# Altium PCB ATRACK_HOST_V1.PcbDoc (part 2 of 3)
Units mm, origin at the board's own origin, x right, y up, seen from the top; angles counter-clockwise.
Board outline 156.4 x 87 mm, 2 copper layers (Top Layer, Bottom Layer); 274 components, 223 nets, 864 pads, 145 vias.
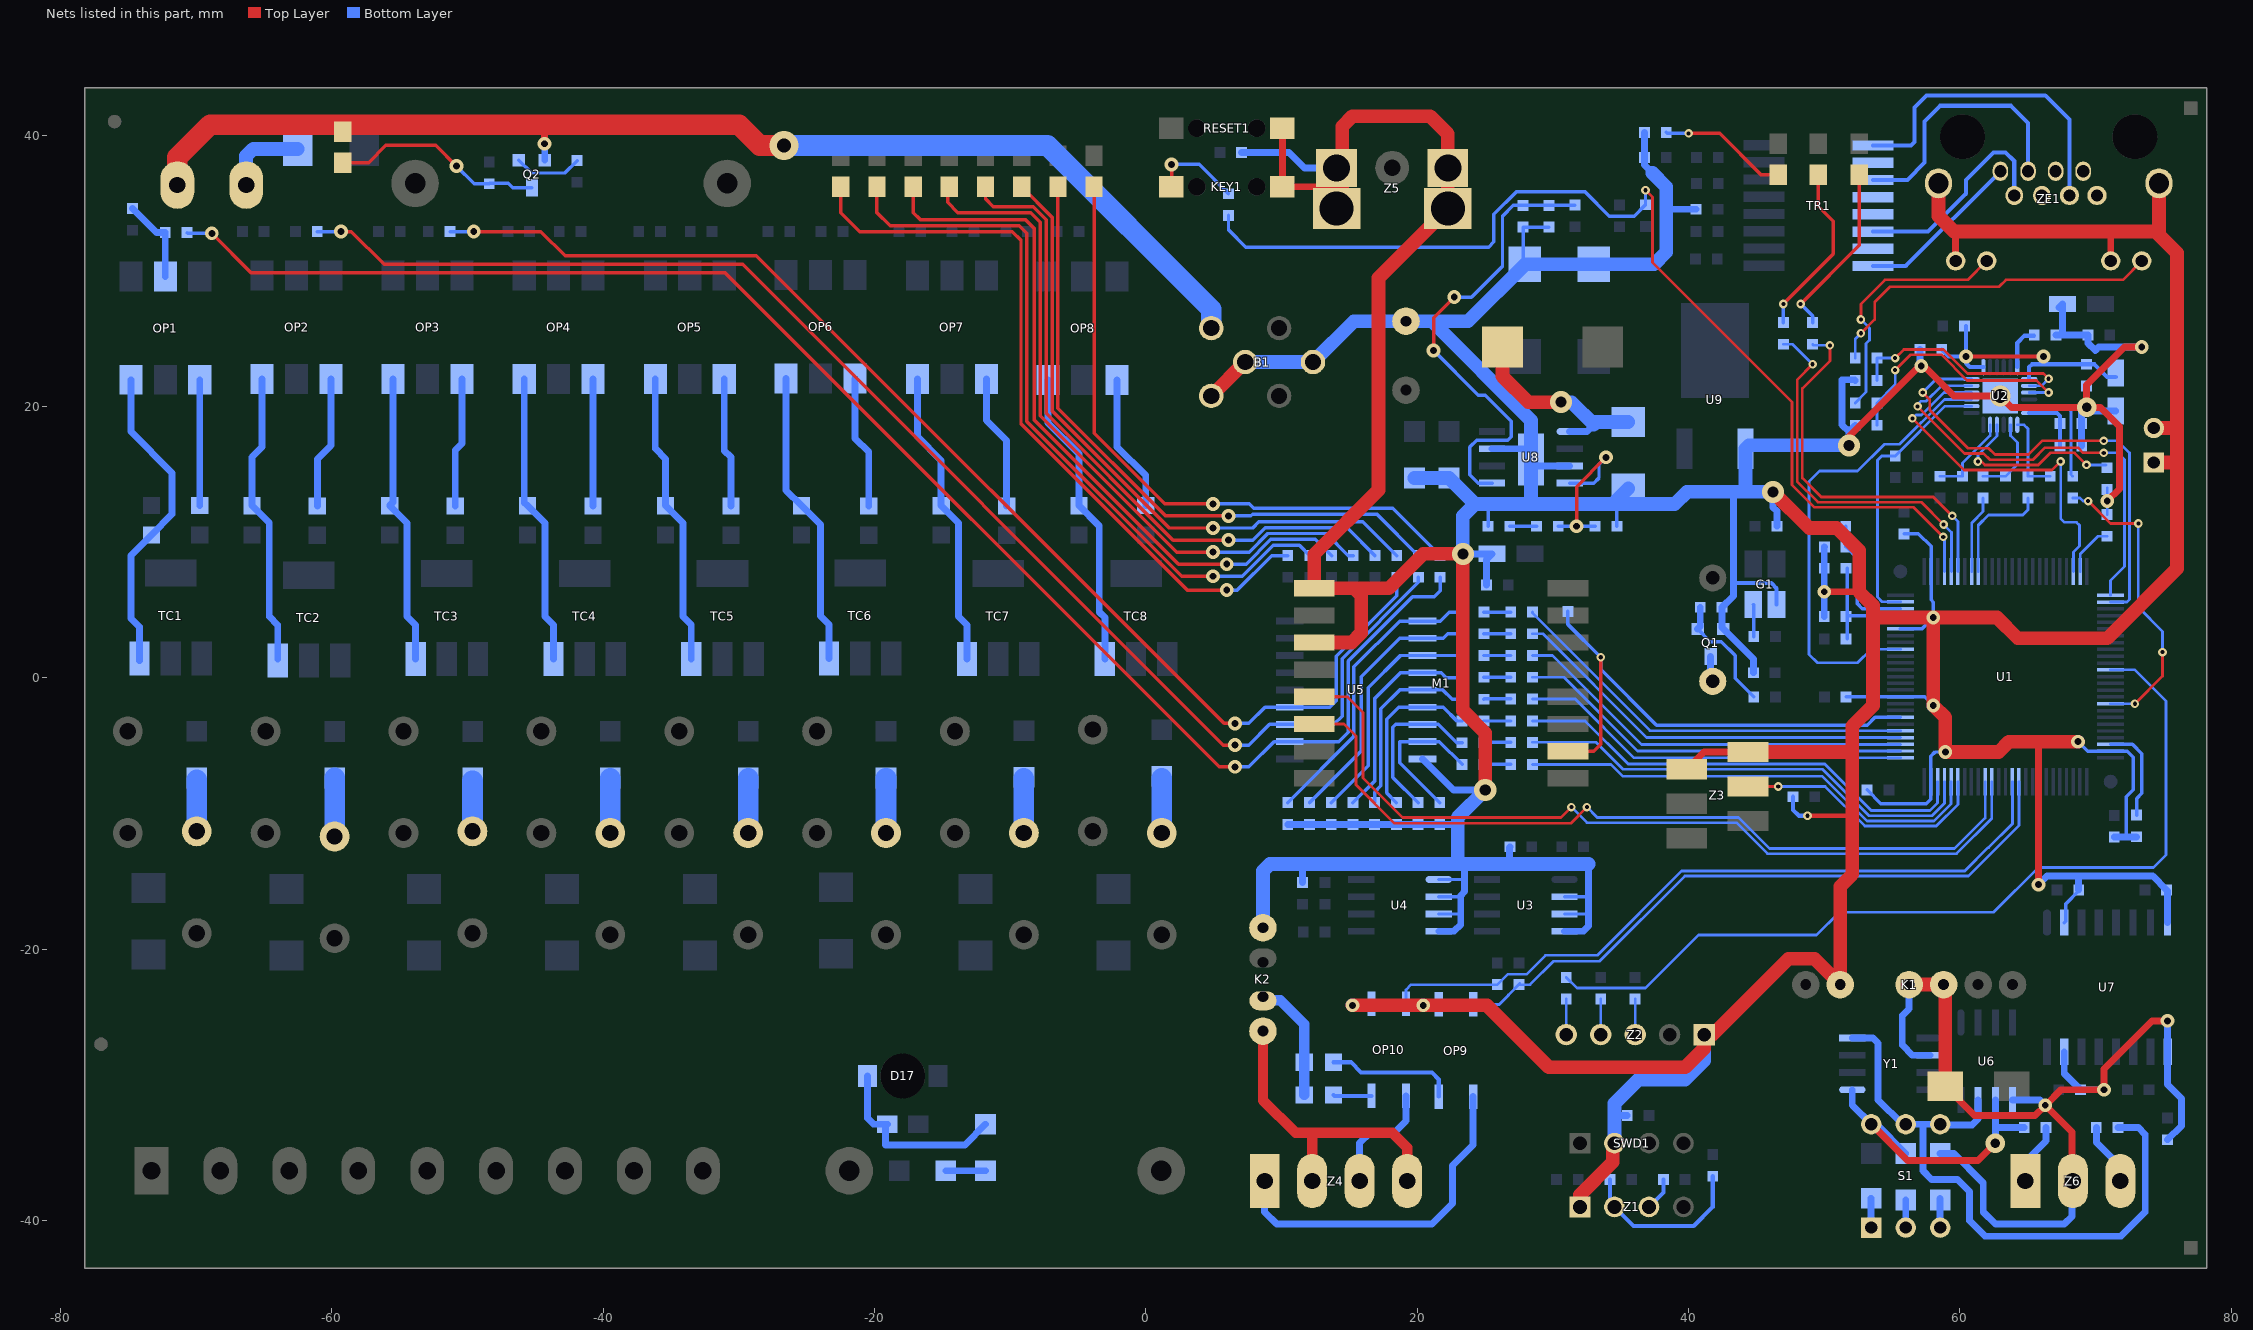
[diagram p2: the nets of this part, all layers, seen from the top]

## Via types
v1: diameter 1.016, hole 0.508, Top Layer to Bottom Layer, tented both sides, 58 vias
v2: diameter 0.635, hole 0.305, Top Layer to Bottom Layer, tented both sides, 39 vias
v3: diameter 0.635, hole 0.3, Top Layer to Bottom Layer, tented both sides, 18 vias
v4: diameter 1.626, hole 0.813, Top Layer to Bottom Layer, tented both sides, 15 vias
v5: diameter 1.422, hole 0.711, Top Layer to Bottom Layer, tented both sides, 7 vias
v6: diameter 1.016, hole 0.5, Top Layer to Bottom Layer, tented both sides, 5 vias
v7: diameter 2.134, hole 1.016, Top Layer to Bottom Layer, tented both sides, 1 vias
v8: diameter 1.524, hole 1, Top Layer to Bottom Layer, tented both sides, 1 vias
v9: diameter 1.422, hole 0.7, Top Layer to Bottom Layer, tented both sides, 1 vias

## Nets (pads, with @x,y where several pads share a name; then routed paths per layer and width w, separated by ;. In a path a pad name is that pad's centre, name@x,y a point inside that pad or via, vN(x,y) a via of type N, cw(c..) or ccw(c..) an arc to the next point about the centre after c; other vN are vias at no path point) (continued)
E_OSC: R34.1 U1.67 | length 22.4
  Top Layer w0.203: v3(69.457,13.03) 71.108,11.379 v3(73.152,11.379) ; v2(72.898,-1.905) 74.93,0.127 v2(74.93,1.905)
  Bottom Layer w0.203: R34.1@68.314,13.257 68.849,13.257 69.076,13.03 v3(69.457,13.03) ; U1.67@71.108,-1.905 v2(72.898,-1.905) v2@73.064,-1.905 ; v3(73.152,11.379) 73.152,5.207 74.93,3.429 v2(74.93,1.905)
E_REF_CLK: R24.1 U1.24 U2.14 | length 20.5
  Bottom Layer w0.203: U1.24@55.614,5.613 54.268,5.613 53.925,5.956 53.925,16.04 54.244,16.359 R24.1@55.233,16.359 58.901,20.027 U2.14@60.855,20.027
E_RST: U1.17 U2.15 | length 34.6
  Bottom Layer w0.203: U1.17@55.614,2.108 53.455,2.108 52.464,1.118 49.493,1.118 48.883,1.727 48.883,14.466 49.657,15.24 52.451,15.24 54.432,17.221 55.556,17.221 58.862,20.527 U2.15@60.855,20.527
E_RXD0: R28.1 U1.33 | length 5.8
  Bottom Layer w0.203: U1.33@60.872,7.849 60.872,11.43 61.71,12.268 R28.1@61.71,13.257
E_RXD1: R29.1 U1.34 | length 8.4
  Bottom Layer w0.203: U1.34@61.354,7.849 61.354,11.251 62.118,12.014 64.631,12.014 65.012,12.395 R29.1@65.012,13.257
E_TX_EN: U1.48 U2.16 | length 27.3
  Top Layer w0.203: v3(56.503,19.126) 60.313,15.316 66.79,15.316 v3(67.425,15.951)
  Bottom Layer w0.203: v3(56.503,19.126) 56.757,19.38 57.176,19.38 58.823,21.027 U2.16@60.855,21.027 ; v3(67.425,15.951) 67.425,11.76 67.717,11.468 68.606,11.468 68.822,11.252 68.822,9.728 68.365,9.271 U1.48@68.365,7.849
E_TXD0: U1.51 U2.17 | length 32.7
  Top Layer w0.203: v3(56.884,20.015) 60.351,16.548 61.748,16.548 62.218,16.078 65.393,16.078 66.282,16.967 68.695,16.967 69.076,16.586 v3(70.6,16.586)
  Bottom Layer w0.203: v3(56.884,20.015) 56.884,20.142 57.138,20.396 57.519,20.396 58.65,21.527 U2.17@60.855,21.527 ; v3(70.6,16.586) 71.616,16.586 72.124,16.078 72.124,8.204 71.108,7.188 U1.51@71.108,6.096
E_TXD1: U1.52 U2.18 | length 34.6
  Top Layer w0.203: v3(57.265,21.031) 57.773,20.523 57.773,19.761 60.605,16.929 62.122,16.929 62.592,16.459 65.05,16.459 66.066,17.475 v3(70.6,17.475)
  Bottom Layer w0.203: v3(57.265,21.031) 58.261,22.027 U2.18@60.855,22.027 ; v3(70.6,17.475) 71.616,17.475 72.505,16.586 72.505,5.791 72.302,5.588 U1.52@71.108,5.588
ELED1A: R32.1 ZE1.10 | length 18.6
  Top Layer w0.203: v2(52.705,26.416) 52.705,27.559 54.483,29.337 60.579,29.337 ZE1.10@61.976,30.734
  Bottom Layer w0.203: R32.1@52.285,20.269 53.086,21.07 53.086,24.638 53.34,24.892 53.34,25.781 v2(52.705,26.416)
ELED2A: R33.1 ZE1.12 | length 25.7
  Top Layer w0.203: v2(52.705,25.4) 53.721,26.416 53.721,27.686 54.864,28.829 62.896,28.829 63.404,29.337 72.009,29.337 ZE1.12@73.406,30.734
  Bottom Layer w0.203: R33.1@52.285,23.571 52.285,24.98 v2(52.705,25.4)
ERX+: TR1.11 ZE1.3 | length 19.6
  Bottom Layer w0.305: TR1.11@53.594,36.703 56.134,36.703 57.404,37.973 57.404,41.021 58.547,42.164 63.754,42.164 65.024,40.894 ZE1.3@65.024,37.338
ERX-: TR1.9 ZE1.6 | length 23.8
  Bottom Layer w0.305: TR1.9@53.594,39.243 56.388,39.243 56.642,39.497 56.642,42.037 57.531,42.926 66.294,42.926 68.072,41.148 ZE1.6@68.072,35.56
ETH9: TR1.15
ETH10: TR1.10
ETH11: TR1.13
ETH12: TR1.12
ETH13: ZE1.4
ETH14: ZE1.5
ETH15: ZE1.7
ETH16: ZE1.8
ETX+: TR1.16 ZE1.1 | length 12.3
  Bottom Layer w0.305: TR1.16@53.594,30.353 56.007,30.353 ZE1.1@62.992,37.338
ETX-: TR1.14 ZE1.2 | length 16.2
  Bottom Layer w0.305: TR1.14@53.594,32.893 57.658,32.893 60.452,35.687 60.452,36.703 62.484,38.735 63.373,38.735 64.008,38.1 ZE1.2@64.008,35.56
GND: B1.CG1 B1.CG2 B1.CG3 C1.2 C2.2 C3.1 C4.2 C5.1 C6.2 C7.2 C8.2 C9.2 C10.2 C11.2 C12.2 C13.1 C14.1 C15.1 C16.1 C17.1 C18.1 C19.1 C20.1 C21.1 C22.2 C23.1 C24.1 C33.2 C38.1 C40.2 C42.1 C43.1 C44.1 C45.1 D20.A G1.2 GND1.1 GND1.2 K1.2 K2.1 KEY1.2 M1.9 M1.11 OP9.3 OP10.3 Q1.E R1.2 R5.2 R6.2 R8.1 R14.1 R18.2 R30.1 R35.1 R36.1 R37.1 R53.1 R55.1 R59.1 R61.1 R64.1 R66.1 R70.1 R72.1 R112.2 R113.2 R114.2 RESET1.1 SWD1.2 U1.10 U1.20 U1.27 U1.74 U1.99 U2.25 U3.2 U3.3 U3.4 U4.1 U4.2 U4.3 U4.4 U5.9 U7.2 U7.8 U8.3 U8.7 U8.9 U9.1 Z1.1 Z2.1 Z3.5 Z3.6 Z5.G1 Z5.G2 Z5.G3 Z5.G4 ZE1.9 ZE1.11 ZE1.G1 ZE1.G2 | length 700.5
  Top Layer w0.305: v2(48.768,-10.16) 52.07,-10.16
  Top Layer w0.508: RESET1.1@10.069,40.513 KEY1.2@10.069,36.195 Z5.G4@14.478,36.195 ; Z3.5@39.878,-6.731 41.148,-5.461 Z3.6@44.378,-5.461 ; v1(50.004,6.35) 52.578,6.35 ; v4(51.816,17.145) 51.816,17.78 56.972,22.936 57.392,22.936 59.551,20.777 v8(62.98,20.777) 63.818,19.939 v9(69.342,19.939) ; 59.563,32.893 59.69,32.766 ZE1.9@59.69,30.734 ; 65.659,-4.699 65.786,-4.826 v1(65.786,-15.24) ; v6(70.854,13.03) 71.755,13.931 71.755,18.542 70.358,19.939 v9(69.342,19.939) ; ZE1.11@71.12,30.734 71.12,32.893 ; v1(73.406,24.384) 72.136,24.384 69.342,21.59 v9(69.342,19.939)
  Top Layer w1.016: B1.CG1@4.826,20.781 B1.CG2@7.326,23.281 ; M1.11@12.415,2.603 15.176,2.603 15.875,3.302 15.875,6.096 15.368,6.603 ; Z5.G3@14.061,34.592 14.478,35.009 14.478,36.195 14.478,40.64 15.24,41.402 20.955,41.402 22.261,40.096 Z5.G2@22.261,37.592 Z5.G1@22.261,34.592 17.145,29.476 17.145,13.843 12.415,9.113 M1.9@12.415,6.603 15.368,6.603 ; v1(15.24,-24.13) v1(20.447,-24.13) 25.146,-24.13 29.718,-28.702 39.751,-28.702 41.148,-27.305 Z2.1@41.148,-26.289 41.783,-26.289 47.371,-20.701 49.276,-20.701 K1.2@51.181,-22.606 51.181,-15.367 52.07,-14.478 52.07,-10.16 52.07,-5.461 ; v4(25.019,-8.255) 25.019,-4.064 23.368,-2.413 v4(23.368,9.144) 20.447,9.144 17.906,6.603 15.368,6.603 ; Z1.1@32.004,-38.989 32.004,-38.1 34.417,-35.687 SWD1.2@34.417,-34.29 ; Z3.6@44.378,-5.461 52.07,-5.461 ; v4(46.228,13.716) 48.895,11.049 50.927,11.049 52.578,9.398 52.578,6.35 53.594,5.334 53.594,4.445 ; ZE1.G2@58.42,36.449 58.42,34.036 59.563,32.893 71.12,32.893 74.422,32.893 74.676,32.639 ; v1(68.707,-4.699) 65.659,-4.699 63.627,-4.699 62.865,-5.461 v1(58.928,-5.461) 58.928,-2.921 v1(58.039,-2.032) v1(58.039,4.445) ; GND1.1@74.295,15.875 75.875,15.875 76,16 ; GND1.2@74.295,18.415 76,18.415 ; ZE1.G1@74.676,36.449 74.676,32.639 ; 52.07,-5.461 52.07,-3.556 53.594,-2.032 53.594,4.445 ; 53.594,4.445 v1(58.039,4.445) ; v1(58.039,4.445) 62.738,4.445 64.262,2.921 70.866,2.921 76,8.055 76,16 ; 74.676,32.639 76,31.315 76,18.415 ; 76,16 76,18.415
  Bottom Layer w0.203: C5.1@70.854,12.041 v6(70.854,13.03) R37.1@70.854,13.894 R37.1@70.854,14.019
  Bottom Layer w0.254: U4.3@21.59,-17.399 23.19,-17.399 23.216,-17.424 ; U4.2@21.59,-16.129 23.216,-16.129 ; U4.1@21.59,-14.859 23.495,-14.859 ; R114.2@25.224,11.176 25.224,12.778 25.273,12.827 ; C45.1@27.94,30.48 27.813,30.607 R112.2@27.813,33.225 R113.2@29.718,33.225 ; U3.3@30.861,-17.399 32.639,-17.399 ; U3.2@30.861,-16.129 32.639,-16.129 ; 34.436,12.827 34.72,12.543 C40.2@34.72,11.176 ; C6.2@51.611,-1.397 U1.10@55.614,-1.397 57.404,-1.397 v1(58.039,-2.032) ; C10.2@53.164,-8.255 54.18,-9.271 57.531,-9.271 57.849,-8.953 U1.99@57.849,-7.645 57.849,-5.778 58.166,-5.461 v1(58.928,-5.461) ; U1.20@55.614,3.607 57.201,3.607 v1(58.039,4.445) 58.039,5.588 57.875,5.752 U1.27@57.875,7.849 57.875,9.689 56.945,10.619 C12.2@55.88,10.619 ; U7.2@67.691,-18.034 67.818,-17.907 67.818,-16.637 68.756,-15.699 C9.2@68.756,-15.621 ; v1(68.707,-4.699) 69.418,-5.41 U1.74@71.108,-5.41 72.339,-5.41 72.771,-5.842 72.771,-8.255 72.263,-8.763 72.263,-11.733
  Bottom Layer w0.305: 43.307,6.985 46.101,6.985 46.482,6.604 G1.2@46.482,5.41 ; R1.2@47.703,-8.763 47.703,-9.73 48.133,-10.16 v2(48.768,-10.16)
  Bottom Layer w0.508: C4.2@7.061,38.735 10.541,38.735 11.684,37.592 Z5.G4@14.061,37.592 Z5.G3@14.061,34.592 ; R53.1@10.465,-10.795 R55.1@12.065,-10.795 R59.1@13.665,-10.795 R70.1@20.066,-10.795 R72.1@21.666,-10.795 22.987,-10.795 ; C22.2@11.557,-15.086 11.557,-13.716 ; v1(15.24,-24.13) 16.51,-24.13 OP10.3@16.637,-24.003 ; U5.9@20.396,-5.969 22.682,-8.255 v4(25.019,-8.255) ; v1(20.447,-24.13) OP9.3@21.59,-24.13 ; U4.4@21.59,-18.669 22.708,-18.669 23.216,-18.161 23.216,-17.424 23.216,-16.129 23.216,-16.027 23.495,-15.748 23.495,-14.859 23.495,-13.716 ; v4(23.368,9.144) C23.1@25.527,9.144 25.119,8.736 C24.1@25.119,6.858 ; U8.7@25.527,16.891 28.27,16.891 U8.9@28.397,17.018 ; 26.797,-13.716 26.797,-12.497 C7.2@26.848,-12.446 ; U8.9@28.397,16.104 28.88,15.621 U8.3@31.242,15.621 ; U3.4@30.861,-18.669 32.258,-18.669 32.639,-18.288 32.639,-17.399 32.639,-16.129 32.639,-13.716 ; 34.544,-32.258 R8.1@35.484,-32.258 ; R18.2@36.754,40.208 C13.1@36.754,38.354 36.754,37.795 37.338,37.211 ; 38.354,34.544 C14.1@40.564,34.544 ; 43.307,13.716 43.307,6.985 43.307,6.047 R6.2@42.467,5.207 42.467,3.71 Q1.E@42.57,3.607 44.782,1.395 R5.2@44.782,0.381 ; v4(46.228,13.716) 46.228,12.573 46.509,12.292 C8.2@46.509,11.176 ; C2.2@50.004,4.521 v1(50.004,6.35) C1.2@50.004,8.077 50.004,9.645 R14.1@50.011,9.652 ; v4(51.816,17.145) 51.816,18.149 ; R36.1@52.285,18.618 51.816,18.149 ; R35.1@52.285,21.92 52.234,21.971 51.308,21.971 51.308,18.657 51.816,18.149 ; v6@57.062,22.987 C16.1@57.062,24.206 ; v1(65.786,-15.24) 66.421,-14.605 68.707,-14.605 ; R30.1@67.083,25.273 67.564,25.273 ; C21.1@67.31,27.305 C21.1@67.564,27.559 67.564,25.273 ; C9.2@68.756,-15.621 68.756,-14.654 68.707,-14.605 ; C20.1@68.976,17.094 C18.1@68.976,18.745 68.976,19.573 v9(69.342,19.939) ; C15.1@69.33,21.512 69.342,21.5 v9(69.342,19.939) ; C11.2@71.374,-11.733 72.263,-11.733 73.003,-11.733 C3.1@73.025,-11.711 ; C17.1@71.489,19.679 69.602,19.679 v9(69.342,19.939) ; v1(73.406,24.384) 70.231,24.384 69.977,24.13 69.442,24.665 C19.1@69.442,25.273 67.564,25.273 ; U7.8@75.311,-18.034 75.311,-15.699 C33.2@75.233,-15.621 74.217,-14.605 68.707,-14.605
  Bottom Layer w1.016: B1.CG2@7.326,23.281 B1.CG3@12.326,23.281 15.334,26.289 C38.1@19.177,26.289 23.749,26.289 C45.1@27.94,30.48 C44.1@33.02,30.48 37.465,30.48 38.354,31.369 38.354,34.544 38.354,36.195 37.338,37.211 ; K2.1@8.636,-18.415 8.636,-14.224 9.144,-13.716 11.557,-13.716 22.987,-13.716 ; C42.1@19.807,14.735 C43.1@22.347,14.735 24.255,12.827 ; 21.082,26.289 28.397,18.974 28.397,17.018 U8.9@28.397,16.104 28.397,13.005 28.575,12.827 ; v4(23.368,9.144) 23.368,11.94 24.255,12.827 ; v4(25.019,-8.255) 22.987,-10.287 22.987,-10.795 22.987,-13.716 ; 32.639,-13.716 26.797,-13.716 23.495,-13.716 22.987,-13.716 ; SWD1.2@34.544,-34.29 34.544,-32.258 34.544,-31.369 36.322,-29.591 39.751,-29.591 41.148,-28.194 Z2.1@41.148,-26.289 ; D20.A@35.56,13.951 34.436,12.827 ; v4(46.228,13.716) 44.196,13.716 ; v4(51.816,17.145) 44.45,17.145 U9.1@44.196,16.891 44.196,13.716 ; 24.255,12.827 25.273,12.827 28.575,12.827 ; 28.575,12.827 34.436,12.827 ; 34.436,12.827 38.989,12.827 39.878,13.716 43.307,13.716 44.196,13.716
  other v6: 57.15,22.987
GND_I: C34.1 C36.2 C37.2 K1.4 K1.5 R108.2 U6.5 U7.9 U7.15 Y1.6 Z6.2 | length 76.8
  Top Layer w0.508: C34.1@58.928,-30.099 61.087,-32.258 65.532,-32.258 v1(66.294,-31.496) ; Z6.2@68.255,-36.83 68.255,-33.457 v1(66.294,-31.496) ; v1(75.311,-25.273) 74.168,-25.273 70.612,-28.829 v1(70.612,-30.353) 67.437,-30.353 v1(66.294,-31.496)
  Top Layer w1.016: K1.4@56.261,-22.606 K1.5@57.912,-22.606 ; K1.5@58.801,-22.606 58.928,-22.733 C34.1@58.928,-30.099
  Bottom Layer w0.508: K1.4@56.261,-22.606 56.261,-24.384 55.753,-24.892 55.753,-27.051 56.515,-27.813 Y1.6@57.785,-27.813 ; R108.2@58.547,-35.052 59.563,-35.052 61.722,-37.211 61.722,-39.37 62.611,-40.259 67.691,-40.259 68.255,-39.695 Z6.2@68.255,-36.83 ; U6.5@63.881,-31.115 65.913,-31.115 v1(66.294,-31.496) ; U7.15@67.691,-27.559 67.691,-29.161 C36.2@68.883,-30.353 v1(70.612,-30.353) ; C37.2@75.311,-34.036 76.327,-33.02 76.327,-30.988 75.311,-29.972 U7.9@75.311,-27.559 v1(75.311,-25.273)
GNDZ: B1.PSG D21.K Q2.E Z7.1 | length 89.4
  Top Layer w0.508: v1(-44.323,39.37) -44.323,40.767
  Top Layer w1.524: Z7.1@-71.374,35.814 Z7.1@-71.374,36.322 -71.374,38.354 -68.961,40.767 -44.323,40.767 -29.972,40.767 -28.448,39.243 v7(-26.67,39.243)
  Bottom Layer w0.508: v1(-44.323,39.37) -44.298,39.345 Q2.E@-44.298,38.151
  Bottom Layer w1.524: v7(-26.67,39.243) -7.239,39.243 4.826,27.178 B1.PSG@4.826,25.781
HD_VER: R12.1 R14.2 U1.23 | length 9.4
  Bottom Layer w0.254: R12.1@51.589,11.176 51.589,9.674 R14.2@51.611,9.652 52.451,8.812 52.451,5.461 52.807,5.105 U1.23@55.614,5.105
INP1: OP9.4 R117.1 U1.86 | length 50.1
  Bottom Layer w0.203: OP9.4@24.13,-24.061 26.053,-24.061 R117.1@27.508,-22.606 28.321,-22.606 30.048,-20.879 33.453,-20.879 39.727,-14.605 60.621,-14.605 64.352,-10.875 U1.86@64.352,-7.645 ; 26.721,-23.368 R117.1@27.559,-22.53
INP2: OP10.4 R119.1 U1.87 | length 53.9
  Bottom Layer w0.203: OP10.4@19.177,-24.003 19.177,-22.987 19.558,-22.606 R119.1@25.908,-22.606 26.67,-21.844 28.067,-21.844 29.464,-20.447 33.274,-20.447 39.497,-14.224 60.356,-14.224 62.067,-12.513 62.103,-12.513 63.869,-10.747 U1.87@63.869,-7.645
INT_R: M1.2 R41.2 U1.7 | length 38.3
  Top Layer w0.254: M1.2@31.115,-5.397 33.02,-5.397 33.528,-4.889 v2(33.528,1.524)
  Bottom Layer w0.254: R41.2@31.115,4.904 31.115,3.937 v2(33.528,1.524) 33.528,0.635 37.643,-3.48 53.162,-3.48 53.746,-2.896 U1.7@55.614,-2.896
IRQ_K: F4.1 U1.62 | length 65
  Bottom Layer w0.203: F4.1@30.988,-22.071 31.777,-22.86 36.83,-22.86 40.742,-18.948 49.439,-18.948 51.116,-17.272 62.484,-17.272 65.786,-13.97 74.26,-13.97 75.184,-13.046 75.184,-1.716 72.858,0.61 U1.62@71.108,0.61
K_IRQ: U1.95 Z3.4 | length 19
  Top Layer w0.203: Z3.4@44.378,-8.001 v2(46.609,-8.001)
  Bottom Layer w0.203: v2(46.609,-8.001) 50.073,-8.001 52.994,-10.922 58.258,-10.922 59.856,-9.325 U1.95@59.856,-7.645
KY1: F1.2 R15.1 U1.29 | length 79.2
  Top Layer w0.203: v2(36.83,35.941) 37.338,35.433 37.338,30.607 47.625,20.32 47.625,14.224 49.276,12.573 56.597,12.573 v2(58.776,10.394)
  Bottom Layer w0.203: R15.1@36.83,34.874 v2(36.83,35.941) ; v2(58.776,10.394) 58.674,10.496 58.674,10.541 58.865,10.35 U1.29@58.865,7.849
  Bottom Layer w0.254: F1.2@6.096,34.087 6.096,33.02 7.366,31.75 25.273,31.75 25.654,32.131 25.654,34.163 27.305,35.814 32.385,35.814 34.163,34.036 35.992,34.036 R15.1@36.83,34.874
L+: F17.1 R109.2 S1.6 U6.6 Y1.1 | length 22.6
  Top Layer w0.508: S1.6@53.467,-32.893 56.134,-35.56 61.341,-35.56 v5(62.611,-34.29)
  Bottom Layer w0.508: Y1.1@52.07,-30.353 52.07,-31.496 S1.6@53.467,-32.893 53.848,-32.893 R109.2@56.007,-35.052 ; v5(62.611,-34.29) 62.611,-33.147 ; U6.6@62.611,-31.115 62.611,-33.147 ; F17.1@64.743,-33.147 62.611,-33.147
L-: F16.1 S1.4 S1.5 U6.7 Y1.4 | length 47.7
  Bottom Layer w0.508: Y1.4@52.07,-26.543 53.594,-26.543 53.975,-26.924 53.975,-31.115 55.753,-32.893 S1.5@56.007,-32.893 57.277,-32.893 ; S1.4@58.547,-32.944 60.909,-32.944 61.341,-32.512 U6.7@61.341,-31.115 ; S1.4@58.547,-32.893 57.277,-32.893 ; F16.1@71.655,-33.147 73.152,-33.147 73.66,-33.655 73.66,-39.37 71.882,-41.148 61.849,-41.148 60.706,-40.005 60.706,-37.846 59.817,-36.957 57.912,-36.957 57.277,-36.322 57.277,-32.893
LED1: R16.2 U1.31 | length 28.4
  Top Layer w0.203: v2(50.419,24.511) 50.419,23.368 48.387,21.336 48.387,14.732 49.784,13.335 58.039,13.335 v2(59.436,11.938)
  Bottom Layer w0.203: R16.2@49.149,24.589 49.227,24.511 v2(50.419,24.511) ; v2(59.436,11.938) 59.856,11.518 U1.31@59.856,7.849
LED2: R17.2 U1.30 | length 27.7
  Top Layer w0.203: v2(49.149,23.114) 48.006,21.971 48.006,14.478 49.53,12.954 57.15,12.954 v2(58.801,11.303)
  Bottom Layer w0.203: R17.2@46.99,24.589 47.674,24.589 v2(49.149,23.114) ; v2(58.801,11.303) 59.373,10.731 U1.30@59.373,7.849
MISO_R: M1.13 U1.90 | length 62
  Top Layer w0.203: 14.224,-1.397 14.859,-1.397 16.002,-2.54 16.002,-7.366 18.923,-10.287 30.607,-10.287 v2(31.369,-9.525)
  Top Layer w0.254: M1.13@12.415,-1.397 14.224,-1.397
  Bottom Layer w0.203: v2(31.369,-9.525) 32.512,-10.668 43.53,-10.668 45.816,-12.954 59.763,-12.954 62.345,-10.372 U1.90@62.345,-7.645
MOSI_R: M1.14 U1.91 | length 59.9
  Top Layer w0.203: M1.14@12.415,-3.397 14.605,-3.397 15.494,-4.286 15.494,-7.874 18.339,-10.719 31.318,-10.719 v2(32.512,-9.525)
  Bottom Layer w0.203: v2(32.512,-9.525) 33.274,-10.287 43.688,-10.287 45.974,-12.573 59.605,-12.573 61.862,-10.316 U1.91@61.862,-7.645
NetBUZZER1_2: BUZZER1.2 Q1.C | length 1.9
  Bottom Layer w0.508: Q1.C@41.631,1.575 41.631,-0.102 BUZZER1.2@41.783,-0.254
NetC1_1: C1.1 C2.1 R7.1 U1.21 U1.22 | length 11.7
  Bottom Layer w0.254: R7.1@51.704,2.87 C2.1@51.704,4.521 ; C1.1@51.704,8.077 C2.1@51.704,4.521 ; U1.21@55.614,4.115 53.607,4.115 53.582,4.14 53.582,4.521 53.658,4.597 ; U1.22@55.614,4.597 53.658,4.597 ; C2.1@51.704,4.521 51.78,4.597 53.658,4.597
NetC3_2: C3.2 U1.73 | length 7.3
  Bottom Layer w0.254: U1.73@71.108,-4.902 72.72,-4.902 73.406,-5.588 73.406,-8.509 73.025,-8.89 C3.2@73.025,-10.111
NetC5_2: C5.2 U1.49 | length 3.8
  Bottom Layer w0.203: U1.49@68.873,7.849 68.873,9.144 70.17,10.441 C5.2@70.854,10.441
NetC15_2: C15.2 C16.2 C17.2 L1.1 U2.1 U2.19 | length 20.2
  Top Layer w0.305: v6(60.44,23.698) v6(66.155,23.698)
  Bottom Layer w0.305: C16.2@58.662,24.206 59.17,23.698 v6(60.44,23.698) ; L1.1@60.44,25.933 v6(60.44,23.698) ; U2.19@61.73,22.902 60.728,22.902 60.44,23.19 v6(60.44,23.698) ; U2.1@65.105,22.027 65.105,22.902 65.315,23.112 66.155,23.112 ; v6(66.155,23.698) 66.155,23.112 ; C17.2@71.489,22.18 70.848,22.18 69.916,23.112 C15.2@69.33,23.112 67.679,23.112 66.155,23.112
NetC18_2: C18.2 C20.2 U2.6 | length 4.6
  Bottom Layer w0.305: U2.6@65.105,19.527 67.151,19.527 67.376,19.302 C18.2@67.376,18.745 C20.2@67.376,17.094
NetC25_1: C25.1 R44.2 | length 3.8
  Bottom Layer w1.524: C25.1@-69.945,-11.309 -69.945,-7.526 R44.2@-69.94,-7.521
NetC26_1: C26.1 R50.2 | length 4.3
  Bottom Layer w1.524: C26.1@-59.785,-11.69 R50.2@-59.785,-7.381
NetC27_1: C27.1 R57.2 | length 3.7
  Bottom Layer w1.524: C27.1@-49.625,-11.309 R57.2@-49.625,-7.575
NetC28_1: C28.1 R69.2 | length 4
  Bottom Layer w1.524: C28.1@-39.465,-11.429 R69.2@-39.465,-7.388
NetC29_1: C29.1 R76.2 | length 4
  Bottom Layer w1.524: C29.1@-29.305,-11.429 R76.2@-29.305,-7.388
NetC30_1: C30.1 R79.2 | length 4
  Bottom Layer w1.524: C30.1@-19.145,-11.429 R79.2@-19.145,-7.388
NetC31_1: C31.1 R82.2 | length 4
  Bottom Layer w1.524: C31.1@-8.985,-11.429 R82.2@-8.985,-7.388
NetC32_1: C32.1 R86.2 | length 4
  Bottom Layer w1.524: C32.1@1.175,-11.429 R86.2@1.175,-7.388
NetC39_1: C39.1 R114.1 | length 2
  Bottom Layer w0.254: R114.1@26.824,11.176 C39.1@28.802,11.176
NetC39_2: C39.2 C40.1 U8.4 | length 12.7
  Top Layer w0.254: v1(31.75,11.176) 31.75,14.097 v1(33.909,16.256)
  Bottom Layer w0.254: C39.2@30.402,11.176 v1(31.75,11.176) C40.1@33.12,11.176 ; U8.4@31.242,14.351 33.02,14.351 33.401,14.732 33.401,15.748 v1(33.909,16.256)
NetD3_K: D3.K R52.1 | length 55.4
  Top Layer w0.254: D3.K@-22.479,36.195 -22.479,34.29 -21.082,32.893 -9.83,32.893 -9.195,32.258 -9.195,18.72 3.048,6.477 v1(5.969,6.477)
  Bottom Layer w0.254: v1(5.969,6.477) 6.731,6.477 9.271,9.017 R52.1@10.465,9.017
NetD4_K: D4.K R58.1 | length 54.3
  Top Layer w0.254: D4.K@-19.812,36.195 -19.812,34.29 -18.847,33.325 -9.322,33.325 -8.763,32.766 -8.763,18.899 2.643,7.493 v1(4.953,7.493)
  Bottom Layer w0.254: v1(4.953,7.493) 7.112,7.493 9.398,9.779 11.328,9.779 R58.1@12.09,9.017
NetD6_K: D6.K R63.1 | length 53
  Top Layer w0.254: D6.K@-17.145,36.195 -17.145,34.29 -16.637,33.782 -8.89,33.782 -8.204,33.096 -8.204,18.999 2.413,8.382 v1(5.969,8.382)
  Bottom Layer w0.254: v1(5.969,8.382) 7.39,8.382 9.219,10.211 12.497,10.211 R63.1@13.691,9.017
NetD7_K: D7.K R68.1 | length 51.5
  Top Layer w0.254: D7.K@-14.478,36.322 -14.605,36.195 -14.605,35.052 -13.843,34.29 -8.485,34.29 -7.772,33.578 -7.772,19.329 2.286,9.271 v1(4.953,9.271)
  Bottom Layer w0.254: v1(4.953,9.271) 7.62,9.271 8.992,10.643 13.296,10.643 14.922,9.017 R68.1@15.291,9.017
NetD9_K: D9.K R74.1 | length 49.6
  Top Layer w0.254: D9.K@-11.811,36.195 -11.811,35.306 -11.227,34.722 -8.306,34.722 -7.341,33.757 -7.341,19.508 2.008,10.16 v1(6.096,10.16)
  Bottom Layer w0.254: v1(6.096,10.16) 7.898,10.16 8.813,11.074 14.834,11.074 R74.1@16.891,9.017
NetD10_K: D10.K R75.1 | length 47.6
  Top Layer w0.254: D10.K@-9.144,36.195 -6.909,33.96 -6.909,19.687 1.729,11.049 v1(4.953,11.049)
  Bottom Layer w0.254: v1(4.953,11.049) 7.874,11.049 8.331,11.506 16.002,11.506 R75.1@18.491,9.017
NetD12_K: D12.K R77.1 | length 47.5
  Top Layer w0.254: D12.K@-6.477,36.195 -6.477,19.866 1.451,11.938 v1(6.096,11.938)
  Bottom Layer w0.254: v1(6.096,11.938) 7.747,11.938 7.874,12.065 17.044,12.065 R77.1@20.091,9.017
NetD13_K: D13.K R78.1 | length 47.4
  Top Layer w0.254: D13.K@-3.81,36.195 -3.81,18.034 1.397,12.827 v1(4.953,12.827)
  Bottom Layer w0.254: v1(4.953,12.827) 7.62,12.827 7.95,12.497 18.212,12.497 R78.1@21.692,9.017
NetD17_A: D17.A D18.K R90.2 | length 14.3
  Bottom Layer w0.508: D17.A@-20.507,-29.337 -20.507,-32.452 -20.066,-32.893 D18.K@-19.05,-32.893 -19.177,-33.02 -19.177,-34.417 -13.335,-34.417 R90.2@-11.811,-32.893
NetD19_A: D19.A Z7.2 | length 6.7
  Bottom Layer w1.016: Z7.2@-66.294,35.814 -66.313,35.833 -66.313,38.462 -65.786,38.989 D19.A@-62.503,38.989
NetD20_K: D20.K L2.1 U8.1 | length 15
  Top Layer w1.016: L2.1@26.289,24.384 26.289,22.225 28.194,20.32 v4(30.607,20.32)
  Bottom Layer w0.508: U8.1@31.242,18.161 32.512,18.161 33.02,18.669
  Bottom Layer w1.016: v4(30.607,20.32) 31.369,20.32 33.02,18.669 33.202,18.851 D20.K@35.56,18.851
NetD21_A: D21.A Q2.C R115.1 | length 15.8
  Top Layer w0.254: D21.A@-59.182,37.973 -57.277,37.973 -56.007,39.243 -52.324,39.243 v1(-50.8,37.719)
  Bottom Layer w0.254: v1(-50.8,37.719) -49.503,36.422 R115.1@-48.387,36.422 -48.36,36.449 -46.99,36.449 -46.66,36.119 Q2.C@-45.237,36.119
NetF1_1: F1.1 KEY1.1 | length 6.8
  Top Layer w0.254: KEY1.1@1.869,36.195 1.905,36.231 v1(1.905,37.846)
  Bottom Layer w0.254: v1(1.905,37.846) 3.937,37.846 F1.1@6.096,35.687
NetF2_2: F2.2 Z2.3 | length 2.6
  Bottom Layer w0.203: Z2.3@36.068,-26.289 F2.2@36.068,-23.671
NetF3_2: F3.2 Z2.4 | length 2.6
  Bottom Layer w0.203: Z2.4@33.528,-26.289 F3.2@33.528,-23.671
NetF4_2: F4.2 Z2.5 | length 2.6
  Bottom Layer w0.203: Z2.5@30.988,-26.289 F4.2@30.988,-23.671
NetF7_1: F7.1 R42.1 | length 2
  Bottom Layer w0.254: F7.1@24.917,4.851 R42.1@26.899,4.851
NetF8_1: F8.1 R43.1 | length 2
  Bottom Layer w0.254: F8.1@24.917,3.251 R43.1@26.899,3.251
NetF9_1: F9.1 R45.1 | length 2
  Bottom Layer w0.254: F9.1@24.917,1.651 R45.1@26.899,1.651
NetF10_1: F10.1 R46.1 | length 2
  Bottom Layer w0.254: F10.1@24.917,0.051 R46.1@26.897,0.051
NetF11_1: F11.1 R47.1 | length 2
  Bottom Layer w0.254: F11.1@24.917,-1.575 24.943,-1.549 R47.1@26.897,-1.549
NetF12_1: F12.1 R48.1 | length 2
  Bottom Layer w0.254: F12.1@24.917,-3.175 R48.1@26.899,-3.175
NetF13_1: F13.1 R49.1 | length 2
  Bottom Layer w0.254: F13.1@24.917,-4.775 24.943,-4.75 R49.1@26.899,-4.75
NetF14_1: F14.1 R51.1 | length 2
  Bottom Layer w0.254: F14.1@24.917,-6.375 R51.1@26.897,-6.375
NetF16_2: F16.2 Z6.3 | length 4.4
  Bottom Layer w0.508: F16.2@70.055,-33.147 70.055,-34.241 71.755,-35.941 Z6.3@71.755,-36.83
NetF17_2: F17.2 Z6.1 | length 4.3
  Bottom Layer w0.508: Z6.1@64.755,-36.83 64.755,-35.702 66.343,-34.114 F17.2@66.343,-33.147
NetG1_3: G1.3 R2.1 | length 2.4
  Bottom Layer w0.254: G1.3@44.78,5.41 44.804,5.386 R2.1@44.804,3.048
NetK2_3: K2.3 R118.1 R120.1 | length 9.6
  Bottom Layer w0.762: K2.3@8.28,-23.851 K2.3@8.636,-23.495 8.89,-23.749 9.906,-23.749 11.684,-25.527 R118.1@11.684,-28.321 R120.1@11.684,-30.734
NetK2_4: K2.4 Z4.2 Z4.4 | length 23.2
  Top Layer w0.762: K2.4@8.636,-26.035 8.636,-31.115 11.049,-33.528 12.192,-33.528 ; Z4.2@12.263,-37.084 12.263,-33.599 12.192,-33.528 ; Z4.4@19.263,-37.084 19.263,-34.63 18.161,-33.528 12.192,-33.528
NetLD1_K: LD1.K R16.1 | length 13.1
  Top Layer w0.254: v2(48.26,27.559) 52.578,31.877 LD1.K@52.578,37.084
  Bottom Layer w0.254: v2(48.26,27.559) 49.149,26.67 R16.1@49.149,26.189
NetLD2_K: LD2.K R17.1 | length 12.9
  Top Layer w0.254: v2(46.99,27.559) 50.673,31.242 50.673,33.655 49.555,34.773 LD2.K@49.555,37.075
  Bottom Layer w0.254: R17.1@46.99,26.189 v2(46.99,27.559)
NetLD3_K: LD3.K R18.1 | length 9.5
  Top Layer w0.254: v2(40.005,40.132) 42.291,40.132 45.339,37.084 LD3.K@46.609,37.084
  Bottom Layer w0.254: R18.1@38.354,40.208 38.43,40.132 v2(40.005,40.132)
NetOP1_4: OP1.4 R80.1 | length 9.3
  Bottom Layer w0.508: R80.1@-69.723,12.7 OP1.4@-69.723,21.971
NetOP1_6: OP1.6 R83.2 TC1.3 | length 23.5
  Bottom Layer w0.508: OP1.6@-74.803,21.971 -74.803,18.161 -71.755,15.113 -71.755,12.065 R83.2@-73.279,10.541 -74.785,9.035 -74.785,4.389 -74.164,3.768 TC1.3@-74.164,1.427 TC1.3@-74.164,1.264
NetOP2_4: OP2.4 R84.1 | length 9.8
  Bottom Layer w0.508: R84.1@-61.055,12.673 -61.055,16.139 -60.049,17.145 OP2.4@-60.049,22.027
NetOP2_6: OP2.6 R87.2 TC2.3 | length 21.7
  Bottom Layer w0.508: OP2.6@-65.129,22.027 -65.129,17.018 -65.881,16.266 R87.2@-65.881,12.694 -64.597,11.41 -64.597,4.516 -63.976,3.895 TC2.3@-63.976,1.391
NetOP3_4: OP3.4 R88.1 | length 9.6
  Bottom Layer w0.508: R88.1@-50.895,12.673 -50.895,16.766 -50.389,17.272 OP3.4@-50.389,22.027
NetOP3_6: OP3.6 R91.2 TC3.3 | length 21.5
  Bottom Layer w0.508: OP3.6@-55.469,22.027 -55.469,12.946 R91.2@-55.721,12.694 -54.437,11.41 -54.437,4.516 -53.816,3.895 TC3.3@-53.816,1.391
NetOP4_4: OP4.4 R92.1 | length 9.4
  Bottom Layer w0.508: R92.1@-40.735,12.673 -40.735,16.25 -40.729,16.256 OP4.4@-40.729,22.027
NetOP4_6: OP4.6 R94.2 TC4.3 | length 21.5
  Bottom Layer w0.508: OP4.6@-45.809,22.027 -45.809,12.942 R94.2@-45.561,12.694 -44.277,11.41 -44.277,4.516 -43.656,3.895 TC4.3@-43.656,1.391
NetOP5_4: OP5.4 R95.1 | length 9.6
  Bottom Layer w0.508: OP5.4@-31.069,22.027 -31.069,16.764 -30.575,16.27 R95.1@-30.575,12.673
NetOP5_6: OP5.6 R97.2 TC5.3 | length 21.7
  Bottom Layer w0.508: OP5.6@-36.149,22.027 -36.149,16.891 -35.401,16.143 R97.2@-35.401,12.694 -34.117,11.41 -34.117,4.516 -33.496,3.895 TC5.3@-33.496,1.391
NetOP6_4: OP6.4 R98.1 | length 9.8
  Bottom Layer w0.508: OP6.4@-21.423,22.077 -21.423,17.653 -20.415,16.645 R98.1@-20.415,12.673
NetOP6_6: OP6.6 R100.2 TC6.3 | length 21.9
  Bottom Layer w0.508: OP6.6@-26.503,22.077 -26.503,13.829 R100.2@-25.368,12.694 -23.971,11.297 -23.971,4.566 -23.35,3.945 TC6.3@-23.35,1.441
NetOP7_4: OP7.4 R101.1 | length 10
  Bottom Layer w0.508: OP7.4@-11.749,22.027 -11.749,18.988 -10.255,17.494 R101.1@-10.255,12.673
NetOP7_6: OP7.6 R103.2 TC7.3 | length 22.1
  Bottom Layer w0.508: OP7.6@-16.829,22.027 -16.829,17.78 -15.081,16.032 R103.2@-15.081,12.694 -13.797,11.41 -13.797,4.516 -13.176,3.895 TC7.3@-13.176,1.391
NetOP8_4: OP8.4 R104.1 | length 10.1
  Bottom Layer w0.508: OP8.4@-2.117,21.957 -2.117,17.025 0,14.908 R104.1@0,12.7
NetOP8_6: OP8.6 R106.2 TC8.3 | length 22.3
  Bottom Layer w0.508: OP8.6@-7.197,21.957 -7.197,18.796 -4.921,16.52 R106.2@-4.921,12.694 -3.429,11.202 -3.429,4.852 -3.016,4.439 TC8.3@-3.016,1.391
NetOP9_1: OP9.1 Z4.1 | length 25.6
  Bottom Layer w0.508: Z4.1@8.763,-37.084 8.763,-39.37 9.652,-40.259 21.082,-40.259 22.606,-38.735 22.606,-35.941 24.13,-34.417 OP9.1@24.13,-30.861
NetOP9_2: OP9.2 R118.2 | length 9.5
  Bottom Layer w0.305: R118.2@13.843,-28.321 15.113,-28.321 15.875,-29.083 21.082,-29.083 21.59,-29.591 OP9.2@21.59,-30.861
NetOP10_1: OP10.1 Z4.3 | length 8.7
  Bottom Layer w0.508: Z4.3@15.763,-37.084 15.763,-34.305 15.748,-34.29 16.51,-33.528 18.288,-33.528 19.177,-32.639 OP10.1@19.177,-30.803
NetOP10_2: OP10.2 R120.2 | length 2.8
  Bottom Layer w0.305: R120.2@13.843,-30.734 13.912,-30.803 OP10.2@16.637,-30.803
NetQ1_B: Q1.B R3.1 R6.1 | length 8.9
  Bottom Layer w0.254: Q1.B@40.665,3.607 41.605,2.667 42.418,2.667 43.434,1.651 43.434,-0.027 R3.1@44.804,-1.397
  Bottom Layer w0.508: Q1.B@40.665,3.607 40.867,3.808 R6.1@40.867,5.207
NetQ2_B: Q2.B R116.1 | length 5.1
  Bottom Layer w0.254: Q2.B@-46.203,38.151 -45.263,37.211 -42.826,37.211 R116.1@-41.91,38.127
NetR9_1: R9.1 Z1.3 | length 2.5
  Bottom Layer w0.305: Z1.3@37.084,-38.989 38.151,-37.922 R9.1@38.151,-36.957
NetR10_1: R10.1 R11.1 Z1.2 | length 12.8
  Bottom Layer w0.305: R10.1@34.214,-36.957 34.214,-38.659 Z1.2@34.544,-38.989 35.941,-40.386 40.386,-40.386 41.783,-38.989 R11.1@41.783,-36.73
NetR22_2: R22.2 R28.2 U2.8 | length 6
  Bottom Layer w0.203: R28.2@61.71,14.857 R22.2@63.361,14.857 64.25,15.746 64.25,17.336 63.73,17.856 U2.8@63.73,18.652
NetR23_2: R23.2 R31.2 U2.11 | length 6.3
  Bottom Layer w0.203: R23.2@58.535,14.857 R31.2@60.186,14.857 ; R31.2@60.183,14.861 R31.2@60.186,14.857 ; U2.11@62.23,18.652 62.23,17.868 60.186,15.824 R31.2@60.186,14.857
NetR25_2: R25.2 R29.2 U2.7 | length 6.1
  Bottom Layer w0.203: U2.7@64.23,18.652 64.724,18.652 65.012,18.364 R29.2@65.012,14.857 R25.2@66.663,14.857
NetR30_2: R30.2 U2.24 | length 3.3
  Bottom Layer w0.305: U2.24@64.23,22.902 64.23,24.694 64.758,25.222 R30.2@65.471,25.222
NetR32_2: R32.2 R36.2 U2.3 | length 19
  Top Layer w0.203: v3(55.233,22.682) 56.376,23.825 58.631,23.825 60.536,21.92 65.647,21.92 v3(66.536,21.031)
  Bottom Layer w0.203: R36.2@53.885,18.618 R32.2@53.885,20.269 55.233,21.617 v3(55.233,22.682) ; U2.3@65.105,21.027 66.532,21.027 v3(66.536,21.031)
NetR33_2: R33.2 R35.2 U2.2 | length 17.1
  Top Layer w0.203: v3(55.233,23.571) 55.868,24.206 58.789,24.206 60.567,22.428 66.155,22.428 v3(66.536,22.047)
  Bottom Layer w0.203: R35.2@53.885,21.92 R33.2@53.885,23.571 v3(55.233,23.571) ; U2.2@65.105,21.527 66.016,21.527 v3(66.536,22.047)
NetR34_2: R34.2 U2.5 | length 8.1
  Bottom Layer w0.203: U2.5@65.105,20.027 67.794,20.027 68.187,19.634 68.187,14.984 R34.2@68.314,14.857
NetR37_2: R37.2 U2.10 | length 13.6
  Top Layer w0.203: v3(61.329,15.951) 61.583,15.951 61.837,15.697 65.774,15.697 66.663,16.586 68.441,16.586 v3(69.33,15.697)
  Bottom Layer w0.203: v3(61.329,15.951) 61.329,16.428 62.73,17.829 U2.10@62.73,18.652 ; v3(69.33,15.697) R37.2@70.776,15.697
NetR90_1: R90.1 R121.2 | length 2.9
  Bottom Layer w0.508: R121.2@-14.732,-36.322 R90.1@-11.811,-36.322
NetR108_1: R108.1 S1.3 | length 2.2
  Bottom Layer w0.508: S1.3@58.547,-40.513 R108.1@58.547,-38.356
NetR109_1: R109.1 S1.2 | length 2.2
  Bottom Layer w0.508: S1.2@56.007,-40.638 R109.1@56.007,-38.481
NetR110_1: R110.1 S1.1 | length 2.2
  Bottom Layer w0.508: S1.1@53.462,-40.508 R110.1@53.462,-38.351
NetR111_2: R111.2 R112.1 R113.1 U8.5 | length 34.7
  Top Layer w0.254: v1(21.209,24.13) 21.209,26.543 v1(22.733,28.067)
  Bottom Layer w0.254: v1(21.209,24.13) 24.511,20.828 25.019,20.828 26.924,18.923 26.924,17.78 26.67,17.526 24.384,17.526 23.876,17.018 23.876,14.986 24.511,14.351 U8.5@25.527,14.351 ; v1(22.733,28.067) 24.003,28.067 26.289,30.353 26.289,34.036 27.078,34.825 R112.1@27.813,34.825 27.835,34.847 R111.2@31.623,34.847
PK1_1: R51.2 U1.96 | length 34.7
  Bottom Layer w0.203: R51.2@28.497,-6.375 34.285,-6.375 35.148,-7.239 49.849,-7.239 53.151,-10.541 58.101,-10.541 59.348,-9.294 U1.96@59.348,-7.645
PK1_2: F14.2 R72.2 U5.8 | length 11
  Bottom Layer w0.254: R72.2@21.666,-9.195 18.72,-6.249 18.72,-4.699 U5.8@20.396,-4.699 21.641,-4.699 F14.2@23.317,-6.375
PK2_1: R49.2 U1.97 | length 34.6
  Bottom Layer w0.203: R49.2@28.499,-4.75 33.198,-4.75 35.179,-6.731 49.88,-6.731 53.309,-10.16 57.943,-10.16 58.865,-9.238 U1.97@58.865,-7.645
PK2_2: F13.2 R70.2 U5.7 | length 12.1
  Bottom Layer w0.254: R70.2@20.066,-9.195 18.212,-7.341 18.212,-3.632 18.415,-3.429 U5.7@20.396,-3.429 21.565,-3.429 22.911,-4.775 F13.2@23.317,-4.775
PK3_1: R48.2 U1.98 | length 34.4
  Bottom Layer w0.203: R48.2@28.499,-3.175 32.385,-3.175 35.56,-6.35 50.038,-6.35 53.467,-9.779 57.785,-9.779 58.357,-9.207 U1.98@58.357,-7.645
PK3_2: F12.2 R66.2 U5.6 | length 12.8
  Bottom Layer w0.254: R66.2@18.466,-9.195 17.755,-8.484 17.755,-3.048 18.644,-2.159 U5.6@20.396,-2.159 21.92,-2.159 22.936,-3.175 F12.2@23.317,-3.175
PK4_1: R47.2 U1.1 | length 28.9
  Bottom Layer w0.203: R47.2@28.497,-1.549 31.648,-1.549 35.992,-5.893 U1.1@55.614,-5.893
PK4_2: F11.2 R64.2 U5.5 | length 14
  Bottom Layer w0.254: R64.2@16.866,-9.195 16.866,-8.407 17.323,-7.95 17.323,-2.286 18.72,-0.889 U5.5@20.396,-0.889 21.895,-0.889 22.581,-1.575 F11.2@23.317,-1.575
PK5_1: R46.2 U1.2 | length 29.4
  Bottom Layer w0.203: R46.2@28.497,0.051 30.81,0.051 36.246,-5.385 U1.2@55.614,-5.385
PK5_2: F10.2 R61.2 U5.4 | length 15.7
  Bottom Layer w0.254: R61.2@15.265,-9.195 16.891,-7.569 16.891,-1.499 18.771,0.381 U5.4@20.396,0.381 21.768,0.381 22.123,0.025 23.292,0.025 F10.2@23.317,0.051
PK6_1: R45.2 U1.3 | length 29.8
  Bottom Layer w0.203: R45.2@28.499,1.651 29.972,1.651 36.525,-4.902 U1.3@55.614,-4.902
PK6_2: F9.2 R59.2 U5.3 | length 17.5
  Bottom Layer w0.254: R59.2@13.665,-9.195 16.383,-6.477 16.383,-0.737 18.771,1.651 U5.3@20.396,1.651 F9.2@23.317,1.651
PK7_1: R43.2 U1.4 | length 30.3
  Bottom Layer w0.203: R43.2@28.499,3.251 29.261,3.251 36.906,-4.394 U1.4@55.614,-4.394
PK7_2: F8.2 R55.2 U5.2 | length 19.6
  Bottom Layer w0.254: R55.2@12.065,-9.195 15.875,-5.385 15.875,0.076 18.72,2.921 U5.2@20.396,2.921 21.92,2.921 22.25,3.251 F8.2@23.317,3.251
PK8_1: R42.2 U1.5 | length 30.8
  Bottom Layer w0.203: R42.2@28.499,4.851 28.499,4.775 37.16,-3.886 U1.5@55.614,-3.886
PK8_2: F7.2 R53.2 U5.1 | length 21.7
  Bottom Layer w0.254: R53.2@10.465,-9.195 15.342,-4.318 15.342,0.813 18.72,4.191 U5.1@20.396,4.191 21.717,4.191 22.377,4.851 F7.2@23.317,4.851
PZ1: OP1.2 R54.2 R81.2 | length 6.4
  Bottom Layer w0.508: R54.2@-74.676,34.593 -74.674,34.593 -72.898,32.817 R81.2@-72.263,32.817 OP1.2@-72.263,29.591
PZ1_1: R78.2 R81.1 U5.11 | length 118.1
  Top Layer w0.254: v1(-68.834,32.766) -65.913,29.845 -30.988,29.845 5.41,-6.553 v1(6.579,-6.553)
  Bottom Layer w0.254: R81.1@-70.663,32.817 -70.612,32.766 v1(-68.834,32.766) ; v1(6.579,-6.553) 7.595,-6.553 9.449,-4.699 U5.11@10.596,-4.699 14.224,-4.699 14.91,-4.013 14.91,1.245 19.66,5.994 21.26,5.994 21.692,6.426 R78.2@21.692,7.417
PZ1_2: R77.2 R85.1 U5.12 | length 104.7
  Top Layer w0.254: v1(-59.309,32.893) -58.547,32.893 -56.134,30.48 -29.718,30.48 5.715,-4.953 v1(6.579,-4.953)
  Bottom Layer w0.254: R85.1@-61.06,32.893 v1(-59.309,32.893) ; v1(6.579,-4.953) 7.595,-4.953 9.119,-3.429 U5.12@10.596,-3.429 13.868,-3.429 14.478,-2.819 14.478,1.423 20.091,7.037 R77.2@20.091,7.417
PZ1_3: R75.2 R89.1 U5.13 | length 92
  Top Layer w0.254: v1(-49.53,32.893) -44.577,32.893 -42.799,31.115 -28.702,31.115 5.766,-3.353 v1(6.579,-3.353)
  Bottom Layer w0.254: R89.1@-51.281,32.893 v1(-49.53,32.893) ; v1(6.579,-3.353) 7.595,-3.353 8.788,-2.159 U5.13@10.596,-2.159 13.564,-2.159 14.046,-1.676 14.046,1.602 18.491,6.047 R75.2@18.491,7.417